# EAGLE board CT_schematic (EAGLE 7.6.0)

Size 100 x 80 mm. Coordinates in mm from the lower left corner, seen from the top.
Outline: 0,0 100,0 100,80 0,80 0,0
Copper layers (1*16): Top 0.035mm / dielectric 1.5mm / Bottom 0.035mm
Design rules "default": minimum track width 10mil, minimum drill 24mil, track to track 8mil, track to pad 8mil, pad to pad 8mil, via to via 8mil, smd to smd 8mil, copper to edge 40mil, drill to drill 8mil, minimum pad ring 10mil, minimum via ring 8mil, stop-mask expansion 4mil, vias tented up to drill 0mil, thermal gap 10mil

## Footprints (pad centres in the part's own frame; a part is rotated, then mirrored left to right if it is on the bottom)
C0603 = smd 0.8 x 0.8: 1 -0.762,0; 2 0.762,0
C0402 = smd 0.5 x 0.5: 1 -0.508,0; 2 0.508,0
C1206 = smd 1.3 x 1.6: 1 -1.524,0; 2 1.524,0
C1210 = smd 1.2 x 2.5: 1 -1.524,0; 2 1.524,0
EXV-9H = smd 3.505 x 1.676: 1 -2.857,0; 2 2.857,0
L0603 = smd 0.8 x 0.8: 1 -0.762,0; 2 0.762,0
L1210 = smd 1.2 x 2.5: 1 -1.524,0; 2 1.524,0
PJ-037B_PACKAGE = drill 3.7 square: 1 12,0 | drill 3.2 square: 2 6,0
R0603 = smd 0.8 x 0.8: 1 -0.762,0; 2 0.762,0
UFBGA176_25 = smd 0.3 x 0.3: A1 -4.55,4.55; A2 -3.9,4.55; A3 -3.25,4.55; A4 -2.6,4.55; A5 -1.95,4.55; A6 -1.3,4.55; A7 -0.65,4.55; A8 0,4.55; A9 0.65,4.55; A10 1.3,4.55; A11 1.95,4.55; A12 2.6,4.55; A13 3.25,4.55; A14 3.9,4.55; A15 4.55,4.55; B1 -4.55,3.9; B2 -3.9,3.9; B3 -3.25,3.9; B4 -2.6,3.9; B5 -1.95,3.9; B6 -1.3,3.9; B7 -0.65,3.9; B8 0,3.9; B9 0.65,3.9; B10 1.3,3.9; B11 1.95,3.9; B12 2.6,3.9; B13 3.25,3.9; B14 3.9,3.9; B15 4.55,3.9; C1 -4.55,3.25; C2 -3.9,3.25; C3 -3.25,3.25; C4 -2.6,3.25; C5 -1.95,3.25; C6 -1.3,3.25; C7 -0.65,3.25; C8 0,3.25; C9 0.65,3.25; C10 1.3,3.25; C11 1.95,3.25; C12 2.6,3.25; C13 3.25,3.25; C14 3.9,3.25; C15 4.55,3.25; D1 -4.55,2.6; D2 -3.9,2.6; D3 -3.25,2.6; D4 -2.6,2.6; D5 -1.95,2.6; D6 -1.3,2.6; D7 -0.65,2.6; D8 0,2.6; D9 0.65,2.6; D10 1.3,2.6; D11 1.95,2.6; D12 2.6,2.6; D13 3.25,2.6; D14 3.9,2.6; D15 4.55,2.6; E1 -4.55,1.95; E2 -3.9,1.95; E3 -3.25,1.95; E4 -2.6,1.95; E12 2.6,1.95; E13 3.25,1.95; E14 3.9,1.95; E15 4.55,1.95; F1 -4.55,1.3; F2 -3.9,1.3; F3 -3.25,1.3; F4 -2.6,1.3; F6 -1.3,1.3; F7 -0.65,1.3; F8 0,1.3; F9 0.65,1.3; F10 1.3,1.3; F12 2.6,1.3; F13 3.25,1.3; F14 3.9,1.3; F15 4.55,1.3; G1 -4.55,0.65; G2 -3.9,0.65; G3 -3.25,0.65; G4 -2.6,0.65; G6 -1.3,0.65; G7 -0.65,0.65; G8 0,0.65; G9 0.65,0.65; G10 1.3,0.65; G12 2.6,0.65; G13 3.25,0.65; G14 3.9,0.65; G15 4.55,0.65; H1 -4.55,0; H2 -3.9,0; H3 -3.25,0; H4 -2.6,0; H6 -1.3,0; H7 -0.65,0; H8 0,0; H9 0.65,0; H10 1.3,0; H12 2.6,0; H13 3.25,0; H14 3.9,0; H15 4.55,0; J1 -4.55,-0.65; J2 -3.9,-0.65; J3 -3.25,-0.65; J4 -2.6,-0.65; J6 -1.3,-0.65; J7 -0.65,-0.65; J8 0,-0.65; J9 0.65,-0.65; J10 1.3,-0.65; J12 2.6,-0.65; J13 3.25,-0.65; J14 3.9,-0.65; J15 4.55,-0.65; K1 -4.55,-1.3; K2 -3.9,-1.3; K3 -3.25,-1.3; K4 -2.6,-1.3; K6 -1.3,-1.3; K7 -0.65,-1.3; K8 0,-1.3; K9 0.65,-1.3; K10 1.3,-1.3; K12 2.6,-1.3; K13 3.25,-1.3; K14 3.9,-1.3; K15 4.55,-1.3; L1 -4.55,-1.95; L2 -3.9,-1.95; L3 -3.25,-1.95; L4 -2.6,-1.95; L12 2.6,-1.95; L13 3.25,-1.95; L14 3.9,-1.95; L15 4.55,-1.95; M1 -4.55,-2.6; M2 -3.9,-2.6; M3 -3.25,-2.6; M4 -2.6,-2.6; M5 -1.95,-2.6; M6 -1.3,-2.6; M7 -0.65,-2.6; M8 0,-2.6; M9 0.65,-2.6; M10 1.3,-2.6; M11 1.95,-2.6; M12 2.6,-2.6; M13 3.25,-2.6; M14 3.9,-2.6; M15 4.55,-2.6; N1 -4.55,-3.25; N2 -3.9,-3.25; N3 -3.25,-3.25; N4 -2.6,-3.25; N5 -1.95,-3.25; N6 -1.3,-3.25; N7 -0.65,-3.25; N8 0,-3.25; N9 0.65,-3.25; N10 1.3,-3.25; N11 1.95,-3.25; N12 2.6,-3.25; N13 3.25,-3.25; N14 3.9,-3.25; N15 4.55,-3.25; P1 -4.55,-3.9; P2 -3.9,-3.9; P3 -3.25,-3.9; P4 -2.6,-3.9; P5 -1.95,-3.9; P6 -1.3,-3.9; P7 -0.65,-3.9; P8 0,-3.9; P9 0.65,-3.9; P10 1.3,-3.9; P11 1.95,-3.9; P12 2.6,-3.9; P13 3.25,-3.9; P14 3.9,-3.9; P15 4.55,-3.9; R1 -4.55,-4.55; R2 -3.9,-4.55; R3 -3.25,-4.55; R4 -2.6,-4.55; R5 -1.95,-4.55; R6 -1.3,-4.55; R7 -0.65,-4.55; R8 0,-4.55; R9 0.65,-4.55; R10 1.3,-4.55; R11 1.95,-4.55; R12 2.6,-4.55; R13 3.25,-4.55; R14 3.9,-4.55; R15 4.55,-4.55
VFBGA48 = smd 0.35 x 0.35: A1 -1.875,2.625; A2 -1.125,2.625; A3 -0.375,2.625; A4 0.375,2.625; A5 1.125,2.625; A6 1.875,2.625; B1 -1.875,1.875; B2 -1.125,1.875; B3 -0.375,1.875; B4 0.375,1.875; B5 1.125,1.875; B6 1.875,1.875; C1 -1.875,1.125; C2 -1.125,1.125; C3 -0.375,1.125; C4 0.375,1.125; C5 1.125,1.125; C6 1.875,1.125; D1 -1.875,0.375; D2 -1.125,0.375; D3 -0.375,0.375; D4 0.375,0.375; D5 1.125,0.375; D6 1.875,0.375; E1 -1.875,-0.375; E2 -1.125,-0.375; E3 -0.375,-0.375; E4 0.375,-0.375; E5 1.125,-0.375; E6 1.875,-0.375; F1 -1.875,-1.125; F2 -1.125,-1.125; F3 -0.375,-1.125; F4 0.375,-1.125; F5 1.125,-1.125; F6 1.875,-1.125; G1 -1.875,-1.875; G2 -1.125,-1.875; G3 -0.375,-1.875; G4 0.375,-1.875; G5 1.125,-1.875; G6 1.875,-1.875; H1 -1.875,-2.625; H2 -1.125,-2.625; H3 -0.375,-2.625; H4 0.375,-2.625; H5 1.125,-2.625; H6 1.875,-2.625
SAMTEC_FTSH-105-01-L-DV-K = smd 0.762 x 2.794: 1 -2.54,-2.032; 2 -2.54,2.032; 3 -1.27,-2.032; 4 -1.27,2.032; 5 0,-2.032; 6 0,2.032; 7 1.27,-2.032; 8 1.27,2.032; 9 2.54,-2.032; 10 2.54,2.032
SSOP-16 = smd 1.981 x 0.356: 1 -2.464,2.223; 2 -2.464,1.587; 3 -2.464,0.953; 4 -2.464,0.318; 5 -2.464,-0.318; 6 -2.464,-0.953; 7 -2.464,-1.587; 8 -2.464,-2.223; 9 2.464,-2.223; 10 2.464,-1.587; 11 2.464,-0.953; 12 2.464,-0.318; 13 2.464,0.318; 14 2.464,0.953; 15 2.464,1.587; 16 2.464,2.223
HTSS-105-01-G-D = drill 1 pad 1.8 square: 1 0,0 | drill 1 pad 1.8: 2 0,2.54; 3 2.54,0; 4 2.54,2.54; 5 5.08,0; 6 5.08,2.54; 7 7.62,0; 8 7.62,2.54; 9 10.16,0; 10 10.16,2.54
ABS07-32.768KHZ-7-T = smd 1.1 x 2.4: 1 -2.5,0; 2 0,0
ASFL1 = smd 1.7 x 1.5: 1 -1.27,-1.1; 2 1.27,-1.1; 3 1.27,1.1; 4 -1.27,1.1
WSON-8 = smd 0.3 x 0.6: 1 -0.75,0; 2 0.05,0; 3 0.85,0; 4 1.65,0; 5 1.65,3.8; 6 0.85,3.8; 7 0.05,3.8; 8 -0.75,3.8 | smd 3 x 2.6: PAD 0.45,1.9
SON-6 = smd 0.55 x 0.3: 1 -0.355,0.5 | smd 0.52 x 0.3: 2 -0.37,0; 3 -0.37,-0.5; 4 0.37,-0.5; 5 0.37,0; 6 0.37,0.5
SW_4-1437565-2 = smd 1.4 x 2.1: 1 -2.23,4.55; 2 -2.23,-4.55; 3 2.23,4.55; 4 2.23,-4.55
LGM67K-G1J2-24-Z = smd 0.8 x 1.4: A -2,0; C 0,0
NC7SZ125M5X = smd 1.3 x 0.7: 1 -1.3,0.95; 2 -1.3,0; 3 -1.3,-0.95; 4 1.3,-0.95; 5 1.3,0.95
DUMMY_PACKAGE_168 = drill 0.3: 1 0,-1; 2 1.5,-1

## Placement (x,y rotation side)
C1  1e-06  [C0603]  -22.86,59.69 0 top  (outside the outline)
C2  1e-07  [C0603]  -26.67,59.69 0 top  (outside the outline)
C3  1e-07  [C0603]  -30.48,59.69 0 top  (outside the outline)
C4  1e-07  [C0603]  -34.29,59.69 0 top  (outside the outline)
C5  1e-07  [C0603]  -38.1,59.69 0 top  (outside the outline)
C6  1e-07  [C0603]  -41.91,59.69 0 top  (outside the outline)
C7  1e-07  [C0603]  -45.72,59.69 0 top  (outside the outline)
C8  1e-07  [C0603]  -49.53,59.69 0 top  (outside the outline)
C9  1e-07  [C0603]  -53.34,59.69 0 top  (outside the outline)
C10  1e-07  [C0603]  -57.15,59.69 0 top  (outside the outline)
C11  1e-07  [C0603]  -60.96,59.69 0 top  (outside the outline)
C12  1e-07  [C0603]  -64.77,59.69 0 top  (outside the outline)
C13  1e-07  [C0603]  -68.58,59.69 0 top  (outside the outline)
C14  1e-07  [C0603]  -72.39,59.69 0 top  (outside the outline)
C15  1e-07  [C0603]  -15.24,64.77 0 top  (outside the outline)
C16  1e-07  [C0603]  -19.05,64.77 0 top  (outside the outline)
C17  4.7e-06  [C0603]  -64.77,54.61 0 top  (outside the outline)
C18  1e-08  [C0603]  -22.86,64.77 0 top  (outside the outline)
C19  1e-06  [C0603]  -26.67,64.77 0 top  (outside the outline)
C20  2.2e-06  [C0603]  -68.58,54.61 0 top  (outside the outline)
C21  2.2e-06  [C0603]  -72.39,54.61 0 top  (outside the outline)
C22  1e-11  [C0402]  -72.39,64.77 0 top  (outside the outline)
C23  1e-11  [C0402]  -15.24,69.85 0 top  (outside the outline)
C24  1e-07  [C0402]  -19.05,69.85 0 top  (outside the outline)
C25  2.2e-06  [C0603]  -15.24,59.69 0 top  (outside the outline)
C26  1e-07  [C0402]  -22.86,69.85 0 top  (outside the outline)
C27  1e-06  [C0603]  -30.48,64.77 0 top  (outside the outline)
C28  1e-06  [C0603]  -34.29,64.77 0 top  (outside the outline)
C29  2.2e-07  [C0603]  -19.05,59.69 0 top  (outside the outline)
C30  1e-06  [C0603]  -38.1,64.77 0 top  (outside the outline)
C31  1e-06  [C0603]  -41.91,64.77 0 top  (outside the outline)
C32  1e-08  [C0402]  -26.67,69.85 0 top  (outside the outline)
C33  1e-08  [C0402]  -30.48,69.85 0 top  (outside the outline)
C34  1e-05  [C1206]  -22.86,48.26 0 top  (outside the outline)
C35  1e-05  [C1210]  -71.12,40.64 0 top  (outside the outline)
C36  1e-07  [C0402]  -34.29,69.85 0 top  (outside the outline)
C37  0.0001  [EXV-9H]  -17.78,41.91 0 top  (outside the outline)
C38  0.0001  [EXV-9H]  -29.21,41.91 0 top  (outside the outline)
C39  1e-08  [C0402]  -38.1,69.85 0 top  (outside the outline)
C40  1e-08  [C0402]  -41.91,69.85 0 top  (outside the outline)
F1  240.0  [L0603]  -45.72,64.77 0 top  (outside the outline)
I1  1e-05  [L1210]  -16.51,49.53 0 top  (outside the outline)
J1  PJ-037B  [PJ-037B_PACKAGE]  -71.12,7.62 0 top  (outside the outline)
R2  1000.0  [R0603]  -49.53,64.77 0 top  (outside the outline)
R7  4700.0  [R0603]  -53.34,64.77 0 top  (outside the outline)
R8  10000.0  [R0603]  -60.96,48.26 0 top  (outside the outline)
R9  10000.0  [R0603]  -66.04,48.26 0 top  (outside the outline)
R10  10000.0  [R0603]  -71.12,48.26 0 top  (outside the outline)
R11  10000.0  [R0603]  -15.24,54.61 0 top  (outside the outline)
R12  10000.0  [R0603]  -20.32,54.61 0 top  (outside the outline)
R13  10000.0  [R0603]  -25.4,54.61 0 top  (outside the outline)
R14  10000.0  [R0603]  -30.48,54.61 0 top  (outside the outline)
R15  10000.0  [R0603]  -35.56,54.61 0 top  (outside the outline)
R16  10000.0  [R0603]  -40.64,54.61 0 top  (outside the outline)
R17  10000.0  [R0603]  -45.72,54.61 0 top  (outside the outline)
R18  10000.0  [R0603]  -50.8,54.61 0 top  (outside the outline)
R19  5.0  [R0603]  -57.15,64.77 0 top  (outside the outline)
R20  100000.0  [R0603]  -40.64,48.26 0 top  (outside the outline)
R21  100000.0  [R0603]  -45.72,48.26 0 top  (outside the outline)
R22  2231.0  [R0603]  -60.96,64.77 0 top  (outside the outline)
R23  1000.0  [R0603]  -64.77,64.77 0 top  (outside the outline)
R24  10000.0  [R0603]  -55.88,54.61 0 top  (outside the outline)
R25  10000.0  [R0603]  -60.96,54.61 0 top  (outside the outline)
R26  9100.0  [R0603]  -68.58,64.77 0 top  (outside the outline)
R27  680000.0  [R0603]  -50.8,48.26 0 top  (outside the outline)
R28  120000.0  [R0603]  -55.88,48.26 0 top  (outside the outline)
U1  STM32F427IGH6  [UFBGA176_25]  -48.26,6.35 0 top  (outside the outline)
U2  CY62147GE30-45BVXI  [VFBGA48]  -29.21,21.59 0 top  (outside the outline)
U3  FTSH-105-01-L-DV-K  [SAMTEC_FTSH-105-01-L-DV-K]  -35.56,7.62 0 top  (outside the outline)
U4  LTC2804CGN-1#PBF  [SSOP-16]  -67.31,20.32 0 top  (outside the outline)
U5  HTSS-105-01-G-D  [HTSS-105-01-G-D]  -27.94,31.75 0 top  (outside the outline)
U6  ABS07-32.768KHZ-7-T  [ABS07-32.768KHZ-7-T]  -50.8,41.91 0 top  (outside the outline)
U7  ASFL1-25MHZ-NCS  [ASFL1]  -64.77,33.02 0 top  (outside the outline)
U8  LP3878SDX-ADJ/NOPB  [WSON-8]  -48.26,30.48 0 top  (outside the outline)
U9  TPS3895ADRYR  [SON-6]  -49.53,68.58 0 top  (outside the outline)
U10  4-1437565-2  [SW_4-1437565-2]  -46.99,20.32 0 top  (outside the outline)
U11  Q65110A2395  [LGM67K-G1J2-24-Z]  -59.69,41.91 0 top  (outside the outline)
U12  nc7sz125m5x  [NC7SZ125M5X]  -27.94,48.26 0 top  (outside the outline)
U13  nc7sz125m5x  [NC7SZ125M5X]  -34.29,48.26 0 top  (outside the outline)
U14  Dummy  [DUMMY_PACKAGE_168]  -46.99,69.85 0 top  (outside the outline)

## Library data of the parts
C1-C40 F1 I1 J1 R2 R7-R28 U1-U14 = circuit_tree

## Nets
CLK_CRYSTAL_U1_E1: C22.1 U1.E1 U6.1
CLK_CRYSTAL_U1_F1: C23.1 U1.F1 U6.2
CLK_U1_G1: U1.G1 U7.3
GND: C1.2 C2.2 C3.2 C4.2 C5.2 C6.2 C7.2 C8.2 C9.2 C10.2 C11.2 C12.2 C13.2 C14.2 C15.2 C16.2 C17.2 C18.2 C19.2 C20.2 C21.2 C22.2 C23.2 C24.2 C25.2 C26.2 C27.2 C28.2 C30.2 C31.2 C32.2 C33.2 C34.2 C35.2 C36.2 C37.2 C38.2 C39.2 C40.2 J1.2 R2.2 R10.2 R11.2 R18.2 R19.2 R23.2 R26.2 R28.2 U1.D5 U1.D7 U1.D8 U1.D9 U1.F2 U1.F6 U1.F7 U1.F8 U1.F9 U1.F10 U1.F12 U1.G2 U1.G6 U1.G7 U1.G8 U1.G9 U1.G10 U1.G12 U1.H6 U1.H7 U1.H8 U1.H9 U1.H10 U1.H12 U1.J6 U1.J7 U1.J8 U1.J9 U1.J10 U1.K6 U1.K7 U1.K8 U1.K9 U1.K10 U1.M1 U1.M8 U1.M9 U1.N1 U2.D1 U2.E6 U3.3 U3.5 U4.8 U5.9 U7.2 U8.3 U8.PAD U9.2 U11.C U12.2 U12.3 U13.1 U13.3 U14.1
NET_U1_C6: R8.1 U1.C6
NET_U1_D6: R9.1 U1.D6
NET_U1_F13: C21.1 U1.F13
NET_U1_J1: R7.1 U1.J1 U13.4
NET_U1_L4: R11.1 U1.L4
NET_U1_M6: R10.1 U1.M6
NET_U1_M10: C20.1 U1.M10
NET_U1_R1: C18.1 C19.1 F1.1 U1.P1 U1.R1
NET_U1_R14: U11.A
NET_U1_R15: U10.3 U10.4
NET_U3_9: R19.1 U3.9
NET_U4_6: C27.1 U4.6
NET_U4_7: C29.1 I1.2 U4.7
NET_U4_9: C28.1 U4.9
NET_U4_10: C29.2 U4.10
NET_U4_11: R20.1 U4.11
NET_U5_3: U4.1 U5.3
NET_U5_4: U4.2 U5.4
NET_U5_5: U4.3 U5.5
NET_U5_6: U4.4 U5.6
NET_U8_1: C33.1 U8.1
NET_U8_6: R22.2 R23.1 U8.6
NET_U8_8: R21.1 U8.8
NET_U9_1: R25.1 R26.1 U9.1
NET_U9_3: R27.2 R28.1 U9.3
NET_U9_4: R24.1 U9.4 U12.4 U13.2
NET_U10_1: R2.1 U10.1 U10.2
PROC_DAC_OUT2: U1.P4 U14.2
PROC_FMC_A0: U1.E2 U2.A3
PROC_FMC_A1: U1.H3 U2.A4
PROC_FMC_A2: U1.H2 U2.A5
PROC_FMC_A3: U1.J2 U2.B3
PROC_FMC_A4: U1.J3 U2.B4
PROC_FMC_A5: U1.K3 U2.C3
PROC_FMC_A6: U1.P6 U2.C4
PROC_FMC_A7: U1.N6 U2.D4
PROC_FMC_A8: U1.R7 U2.H2
PROC_FMC_A9: U1.P7 U2.H3
PROC_FMC_A10: U1.N7 U2.H4
PROC_FMC_A11: U1.M7 U2.H5
PROC_FMC_A12: U1.L15 U2.G3
PROC_FMC_A13: U1.K15 U2.G4
PROC_FMC_A14: U1.K14 U2.F3
PROC_FMC_A15: U1.K13 U2.F4
PROC_FMC_A16: U1.N14 U2.E4
PROC_FMC_A17: U1.N13 U2.D3
PROC_FMC_D0: U1.M14 U2.B6
PROC_FMC_D1: U1.L14 U2.C5
PROC_FMC_D2: U1.B12 U2.C6
PROC_FMC_D3: U1.C12 U2.D5
PROC_FMC_D4: U1.R8 U2.E5
PROC_FMC_D5: U1.P8 U2.F5
PROC_FMC_D6: U1.P9 U2.F6
PROC_FMC_D7: U1.R9 U2.G6
PROC_FMC_D8: U1.P10 U2.B1
PROC_FMC_D9: U1.R10 U2.C1
PROC_FMC_D10: U1.N11 U2.C2
PROC_FMC_D11: U1.P11 U2.D2
PROC_FMC_D12: U1.R11 U2.E2
PROC_FMC_D13: U1.P15 U2.F2
PROC_FMC_D14: U1.P14 U2.F1
PROC_FMC_D15: U1.N15 U2.G1
PROC_FMC_NBL0: U1.A4 U2.A1
PROC_FMC_NE2: R13.1 U1.C10 U2.B5
PROC_FMC_NOE: R12.1 U1.D10 U2.A2
PROC_FMC_NWE: R14.1 U1.C11 U2.G5
PROC_SYS_JTCK_SWCLK: R18.1 U1.A14 U3.4
PROC_SYS_JTDI: R16.1 U1.A13 U3.8
PROC_SYS_JTDO_SWO: U1.A10 U3.6
PROC_SYS_JTMS_SWDIO: R17.1 U1.A15 U3.2
PROC_UART4_RX: U1.B13 U4.16
PROC_UART4_TX: U1.B14 U4.14
RST_OUT_U3_JTAG_RST_B: R15.1 U3.10 U12.1
VCC_S1_8V1: C34.1 C37.1 C38.1 J1.1 R21.2 U8.4
VCC_TIER1_3V3: C1.1 C2.1 C3.1 C4.1 C5.1 C6.1 C7.1 C8.1 C9.1 C10.1 C11.1 C12.1 C13.1 C14.1 C15.1 C16.1 C17.1 C24.1 C25.1 C26.1 C30.1 C31.1 C32.1 C35.1 C36.1 C39.1 C40.1 F1.2 I1.1 R7.2 R8.2 R9.2 R12.2 R13.2 R14.2 R15.2 R16.2 R17.2 R20.2 R22.1 R24.2 R25.2 R27.1 U1.C1 U1.C5 U1.C7 U1.C8 U1.C9 U1.F3 U1.G3 U1.G13 U1.H13 U1.J12 U1.J13 U1.K4 U1.N8 U1.N9 U1.N10 U2.D6 U2.E1 U3.1 U4.5 U4.12 U7.4 U8.5 U9.6 U12.5 U13.5

## Tracks (layer width: path | path; a pad name or v marks a point on that pad's centre or on a via)
CLK_CRYSTAL_U1_E1  (2 unrouted)
CLK_CRYSTAL_U1_F1  (2 unrouted)
CLK_U1_G1  (1 unrouted)
GND  (101 unrouted)
NET_U1_C6  (1 unrouted)
NET_U1_D6  (1 unrouted)
NET_U1_F13  (1 unrouted)
NET_U1_J1  (2 unrouted)
NET_U1_L4  (1 unrouted)
NET_U1_M6  (1 unrouted)
NET_U1_M10  (1 unrouted)
NET_U1_R1  (4 unrouted)
NET_U1_R15  (1 unrouted)
NET_U3_9  (1 unrouted)
NET_U4_6  (1 unrouted)
NET_U4_7  (2 unrouted)
NET_U4_9  (1 unrouted)
NET_U4_10  (1 unrouted)
NET_U4_11  (1 unrouted)
NET_U5_3  (1 unrouted)
NET_U5_4  (1 unrouted)
NET_U5_5  (1 unrouted)
NET_U5_6  (1 unrouted)
NET_U8_1  (1 unrouted)
NET_U8_6  (2 unrouted)
NET_U8_8  (1 unrouted)
NET_U9_1  (2 unrouted)
NET_U9_3  (2 unrouted)
NET_U9_4  (3 unrouted)
NET_U10_1  (2 unrouted)
PROC_DAC_OUT2  (1 unrouted)
PROC_FMC_A0  (1 unrouted)
PROC_FMC_A1  (1 unrouted)
PROC_FMC_A2  (1 unrouted)
PROC_FMC_A3  (1 unrouted)
PROC_FMC_A4  (1 unrouted)
PROC_FMC_A5  (1 unrouted)
PROC_FMC_A6  (1 unrouted)
PROC_FMC_A7  (1 unrouted)
PROC_FMC_A8  (1 unrouted)
PROC_FMC_A9  (1 unrouted)
PROC_FMC_A10  (1 unrouted)
PROC_FMC_A11  (1 unrouted)
PROC_FMC_A12  (1 unrouted)
PROC_FMC_A13  (1 unrouted)
PROC_FMC_A14  (1 unrouted)
PROC_FMC_A15  (1 unrouted)
PROC_FMC_A16  (1 unrouted)
PROC_FMC_A17  (1 unrouted)
PROC_FMC_D0  (1 unrouted)
PROC_FMC_D1  (1 unrouted)
PROC_FMC_D2  (1 unrouted)
PROC_FMC_D3  (1 unrouted)
PROC_FMC_D4  (1 unrouted)
PROC_FMC_D5  (1 unrouted)
PROC_FMC_D6  (1 unrouted)
PROC_FMC_D7  (1 unrouted)
PROC_FMC_D8  (1 unrouted)
PROC_FMC_D9  (1 unrouted)
PROC_FMC_D10  (1 unrouted)
PROC_FMC_D11  (1 unrouted)
PROC_FMC_D12  (1 unrouted)
PROC_FMC_D13  (1 unrouted)
PROC_FMC_D14  (1 unrouted)
PROC_FMC_D15  (1 unrouted)
PROC_FMC_NBL0  (1 unrouted)
PROC_FMC_NE2  (2 unrouted)
PROC_FMC_NOE  (2 unrouted)
PROC_FMC_NWE  (2 unrouted)
PROC_SYS_JTCK_SWCLK  (2 unrouted)
PROC_SYS_JTDI  (2 unrouted)
PROC_SYS_JTDO_SWO  (1 unrouted)
PROC_SYS_JTMS_SWDIO  (2 unrouted)
PROC_UART4_RX  (1 unrouted)
PROC_UART4_TX  (1 unrouted)
RST_OUT_U3_JTAG_RST_B  (2 unrouted)
VCC_S1_8V1  (5 unrouted)
VCC_TIER1_3V3  (67 unrouted)